# Altium PCB KSS_4_info_LED.PcbDoc
Units mm, origin at the board's own origin, x right, y up, seen from the top; angles counter-clockwise.
Board outline 8 x 27 mm, 2 copper layers (Top Layer, Bottom Layer), stack 1.5 mm thick; 7 components, 7 nets, 18 pads, 0 vias.
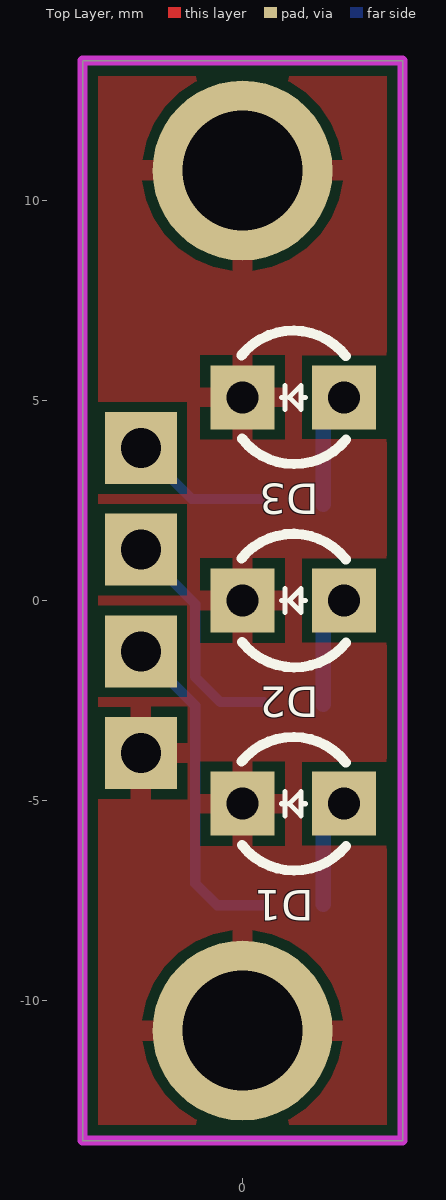
[diagram p0: Top Layer view]
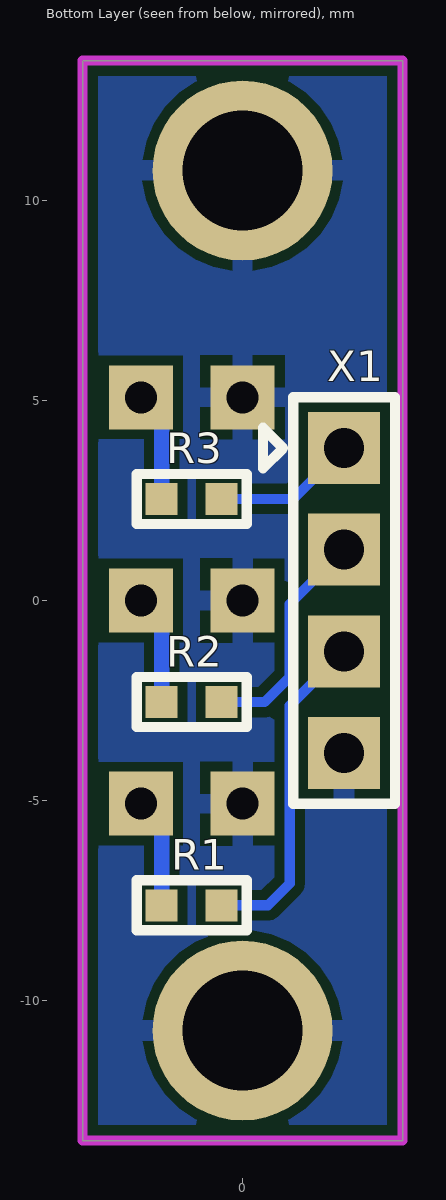
[diagram p1: Bottom Layer view, seen from below]

## Layer stack, top to bottom
Top Solder: solder mask 0.0102, Solder Resist, Dk 3.5
Top Layer: signal copper 0.035
Dielectric 1: dielectric 1.43, FR-4, Dk 4.8
Bottom Layer: signal copper 0.035
Bottom Solder: solder mask 0.0102, Solder Resist, Dk 3.5

## Board outline
-4,-13.5 -4,13.5 4,13.5 4,-13.5

## Design rules (kind name [scope] priority, off if disabled: settings)
Clearance [All] p1: gap=0.254 ignorepadtopadclearanceinfootprint=FALSE except(0: Arc-Hole Track-Hole SMDPad-Hole THPad-Hole Via-Hole Fill-Hole Poly-Hole Region-Hole Text-Hole)
PlaneConnect [All] p1: planeconnectstyle=Direct reliefexpansion=0.508 reliefentries=4 reliefconductorwidth=0.508 reliefairgap=0.254
PolygonConnect [All] p1: connectstyle=Relief reliefconductorwidth=0.508 reliefentries=4 polygonreliefangle="90 Angle" airgapwidth=0.254
RoutingVias [All] p1: holewidth=0.711 width=1.27 viastyle="Through Hole" minholewidth=0.711 minwidth=1.27 maxholewidth=0.711 maxwidth=1.27
SolderMaskExpansion [All] p1: expansion=0.102 istentingtop=FALSE
Width [All] p1: maxlimit=0.762 minlimit=0.254 preferedwidth=0.762
29 further rules are at their usual default settings.

## Classes and differential pairs
component class KSS_4_info_LED: D1 D2 D3 R1 R2 R3

## Components (designator, comment, footprint, x,y, rotation, side; value= is the part's Value field where it differs from the comment)
D1 "RED" LED_RED_3mm 1.27,-5.08 r180 top
D2 "YELLOW" LED_YELLOW_3mm 1.27,0 r180 top
D3 "GREEN" LED_GREEN_3mm 1.27,5.08 r180 top
R1 "Resistor" RES_0603 1.27,-7.62 r180 bottom
R2 "Resistor" RES_0603 1.27,-2.54 r180 bottom
R3 "Resistor" RES_0603 1.27,2.54 r180 bottom
X1 "HEADER_X4" HEADER_1X4_M -2.54,3.81 r270 bottom

## Footprints (in the part's own frame and the unit in brackets; to place one, negate y for a bottom-side part, rotate by r counter-clockwise, add the part's x,y. Pads: shape width x height; smd on the part's side, far side on the other; paste and mask are expansions set on the pad)
HEADER_1X4_M [mm]
  rect 1.8x1.8 hole 1: 1(0,0) 2(2.54,0) 3(5.08,0) 4(7.62,0)
  silkscreen extent -1.27,-2.03 8.89,1.27, body extent -1.27,-1.27 8.89,1.27, height 8.38
LED_GREEN_3mm [mm]
  rect 1.6x1.6 hole 0.8: 1(-1.27,0) 2(1.27,0)
  silkscreen extent -1.32,-1.67 1.29,1.67, body extent -1.66,-1.65 1.64,1.65, height 5.51
LED_RED_3mm [mm]
  rect 1.6x1.6 hole 0.8: 1(-1.27,0) 2(1.27,0)
  silkscreen extent -1.32,-1.67 1.29,1.67, body extent -1.66,-1.65 1.64,1.65, height 5.51
LED_YELLOW_3mm [mm]
  rect 1.6x1.6 hole 0.8: 1(-1.27,0) 2(1.27,0)
  silkscreen extent -1.32,-1.67 1.29,1.67, body extent -1.66,-1.65 1.64,1.65, height 5.51
RES_0603 [mm]
  rect 0.8x0.8 smd: 1(-0.75,0) 2(0.75,0)
  silkscreen extent -1.38,-0.63 1.38,0.63, body extent -0.85,-0.4 0.85,0.4, height 0.56

## Part data
D1 D2 D3: library part "Diode LED"
R1 R2 R3: Resistance=56

## Free pads (board coordinates)
  round 4.5 hole 3: MH(0,-10.75) MH(0,10.75)

## Nets (pads, with @x,y where several pads share a name; then routed paths per layer and width w, separated by ;. In a path a pad name is that pad's centre, name@x,y a point inside that pad or via, vN(x,y) a via of type N, cw(c..) or ccw(c..) an arc to the next point about the centre after c; other vN are vias at no path point)
GND: D1.2 D2.2 D3.2 pad.MH X1.4
NetD1_1: D1.1 R1.1 | length 2.7
  Bottom Layer w0.381: R1.1@2.02,-7.6 D1.1@2.02,-5.6
  Bottom Layer w0.508: D1.1@2.02,-5.6 D1.1
NetD2_1: D2.1 R2.1 | length 2.7
  Bottom Layer w0.381: R2.1@2.02,-2.6 2.02,-0.6 D2.1@2.54,-0.08
NetD3_1: D3.1 R3.1 | length 2.7
  Bottom Layer w0.381: R3.1@2.02,2.4 D3.1@2.02,4.4
  Bottom Layer w0.508: D3.1@2.02,4.56 D3.1
NetR1_2: R1.2 X1.3 | length 8.3
  Bottom Layer w0.254: X1.3 -1.181,-2.629 -1.181,-7.074 -0.635,-7.62 R1.2
NetR2_2: R2.2 X1.2 | length 5.7
  Bottom Layer w0.254: X1.2 -1.181,-0.089 -1.181,-1.911 -0.552,-2.54 R2.2
NetR3_2: R3.2 X1.1 | length 3.6
  Bottom Layer w0.254: X1.1 -1.27,2.54 R3.2

## Polygon pours and split planes (outlines as drawn)
GND on Top Layer "NONET_L-01_P-001" (solid, remove dead copper, pour order 1): -4,13.5 4,13.5 4,-13.5 -4,-13.5
GND on Bottom Layer "NONET_L-01_P-001" (solid, remove dead copper, pour order 0): -4,13.5 4,13.5 4,-13.5 -4,-13.5

## Keep-outs
Keep-Out Layer:
  the board outline again, w0.254